# EAGLE board CT_schematic (EAGLE 7.6.0)

Size 100 x 80 mm. Coordinates in mm from the lower left corner, seen from the top.
Outline: 0,0 100,0 100,80 0,80 0,0
Copper layers (1*16): Top 0.035mm / dielectric 1.5mm / Bottom 0.035mm
Design rules "default": minimum track width 10mil, minimum drill 24mil, track to track 8mil, track to pad 8mil, pad to pad 8mil, via to via 8mil, smd to smd 8mil, copper to edge 40mil, drill to drill 8mil, minimum pad ring 10mil, minimum via ring 8mil, stop-mask expansion 4mil, vias tented up to drill 0mil, thermal gap 10mil

## Footprints (pad centres in the part's own frame; a part is rotated, then mirrored left to right if it is on the bottom)
C0603 = smd 0.8 x 0.8: 1 -0.762,0; 2 0.762,0
C0402 = smd 0.5 x 0.5: 1 -0.508,0; 2 0.508,0
C0805 = smd 1.2 x 1.3: 1 -1.016,0; 2 1.016,0
2220 = smd 1.85 x 5.5: 1 -2.55,0; 2 2.55,0
EXV-9H = smd 3.505 x 1.676: 1 -2.857,0; 2 2.857,0
L0603 = smd 0.8 x 0.8: 1 -0.762,0; 2 0.762,0
DR1040 = smd 1.6 x 3.2: 1 -4.458,0; 2 4.458,0
PJ-037B_PACKAGE = drill 3.7 square: 1 12,0 | drill 3.2 square: 2 6,0
R0603 = smd 0.8 x 0.8: 1 -0.762,0; 2 0.762,0
LQFP100 = smd 0.3 x 1.2: 1 -6,-7.75; 2 -5.5,-7.75; 3 -5,-7.75; 4 -4.5,-7.75; 5 -4,-7.75; 6 -3.5,-7.75; 7 -3,-7.75; 8 -2.5,-7.75; 9 -2,-7.75; 10 -1.5,-7.75; 11 -1,-7.75; 12 -0.5,-7.75; 13 0,-7.75; 14 0.5,-7.75; 15 1,-7.75; 16 1.5,-7.75; 17 2,-7.75; 18 2.5,-7.75; 19 3,-7.75; 20 3.5,-7.75; 21 4,-7.75; 22 4.5,-7.75; 23 5,-7.75; 24 5.5,-7.75; 25 6,-7.75; 51 6,7.75; 52 5.5,7.75; 53 5,7.75; 54 4.5,7.75; 55 4,7.75; 56 3.5,7.75; 57 3,7.75; 58 2.5,7.75; 59 2,7.75; 60 1.5,7.75; 61 1,7.75; 62 0.5,7.75; 63 0,7.75; 64 -0.5,7.75; 65 -1,7.75; 66 -1.5,7.75; 67 -2,7.75; 68 -2.5,7.75; 69 -3,7.75; 70 -3.5,7.75; 71 -4,7.75; 72 -4.5,7.75; 73 -5,7.75; 74 -5.5,7.75; 75 -6,7.75 | smd 1.2 x 0.3: 26 7.75,-6; 27 7.75,-5.5; 28 7.75,-5; 29 7.75,-4.5; 30 7.75,-4; 31 7.75,-3.5; 32 7.75,-3; 33 7.75,-2.5; 34 7.75,-2; 35 7.75,-1.5; 36 7.75,-1; 37 7.75,-0.5; 38 7.75,0; 39 7.75,0.5; 40 7.75,1; 41 7.75,1.5; 42 7.75,2; 43 7.75,2.5; 44 7.75,3; 45 7.75,3.5; 46 7.75,4; 47 7.75,4.5; 48 7.75,5; 49 7.75,5.5; 50 7.75,6; 76 -7.75,6; 77 -7.75,5.5; 78 -7.75,5; 79 -7.75,4.5; 80 -7.75,4; 81 -7.75,3.5; 82 -7.75,3; 83 -7.75,2.5; 84 -7.75,2; 85 -7.75,1.5; 86 -7.75,1; 87 -7.75,0.5; 88 -7.75,0; 89 -7.75,-0.5; 90 -7.75,-1; 91 -7.75,-1.5; 92 -7.75,-2; 93 -7.75,-2.5; 94 -7.75,-3; 95 -7.75,-3.5; 96 -7.75,-4; 97 -7.75,-4.5; 98 -7.75,-5; 99 -7.75,-5.5; 100 -7.75,-6
ARDUCAM = drill 1 pad 1.8 square: 1 0,0 | drill 1 pad 1.8: 2 0,2.54; 3 2.54,0; 4 2.54,2.54; 5 5.08,0; 6 5.08,2.54; 7 7.62,0; 8 7.62,2.54; 9 10.16,0; 10 10.16,2.54; 11 12.7,0; 12 12.7,2.54; 13 15.24,0; 14 15.24,2.54; 15 17.78,0; 16 17.78,2.54; 17 20.32,0; 18 20.32,2.54; 19 22.86,0; 20 22.86,2.54
SSOP-28 = smd 1.5 x 0.4: 1 -3.625,4.225; 2 -3.625,3.575; 3 -3.625,2.925; 4 -3.625,2.275; 5 -3.625,1.625; 6 -3.625,0.975; 7 -3.625,0.325; 8 -3.625,-0.325; 9 -3.625,-0.975; 10 -3.625,-1.625; 11 -3.625,-2.275; 12 -3.625,-2.925; 13 -3.625,-3.575; 14 -3.625,-4.225; 15 3.625,-4.225; 16 3.625,-3.575; 17 3.625,-2.925; 18 3.625,-2.275; 19 3.625,-1.625; 20 3.625,-0.975; 21 3.625,-0.325; 22 3.625,0.325; 23 3.625,0.975; 24 3.625,1.625; 25 3.625,2.275; 26 3.625,2.925; 27 3.625,3.575; 28 3.625,4.225
FCI_10118193-0001LF = smd 0.4 x 1.35: 1 -1.3,2.675; 2 -0.65,2.675; 3 0,2.675; 4 0.65,2.675; 5 1.3,2.675 | smd 1.6 x 1.4: 6 -3.2,2.45; 7 3.2,2.45 | smd 1.9 x 1.9: 8 -1.2,0; 9 1.2,0 | hole 0.5: -3.3,0; 3.3,0
SOT-23-8 = smd 0.4 x 1.2: 1 -0.975,-1.3; 2 -0.325,-1.3; 3 0.325,-1.3; 4 0.975,-1.3; 5 0.975,1.3; 6 0.325,1.3; 7 -0.325,1.3; 8 -0.975,1.3
182-009-MALE = drill 1.194 pad 1.524 octagon: 1 -5.537,10.923; 2 -2.769,10.923; 3 0,10.923; 4 2.769,10.923; 5 5.537,10.923; 6 -4.153,8.08; 7 -1.384,8.08; 8 1.384,8.08; 9 4.153,8.08 | hole 3.048: -12.446,9.501; 12.446,9.501
WSON-8-PAD = smd 0.45 x 0.7: 1 -0.75,-0.95; 2 0.52,-0.95; 3 1.79,-0.95; 4 3.06,-0.95; 5 3.06,4.35; 6 1.79,4.35; 7 0.52,4.35; 8 -0.75,4.35 | smd 4 x 3.5: PAD 1.15,1.7
ABLS-12.000MHZ-B4-T = smd 5.6 x 2.8: 1 0,0; 2 9.5,0
ASEK = smd 1.4 x 1: 1 -1.1,-0.8; 2 1.1,-0.8; 3 1.1,0.8; 4 -1.1,0.8
ASFL1 = smd 1.7 x 1.5: 1 -1.27,-1.1; 2 1.27,-1.1; 3 1.27,1.1; 4 -1.27,1.1
IDT74FCT38072 = smd 0.51 x 1: 1 0,0; 2 1.27,0; 3 2.54,0; 4 3.81,0; 5 3.81,4.95; 6 2.54,4.95; 7 1.27,4.95; 8 0,4.95
QFN-16_EP = smd 0.805 x 0.3: 1 -1.452,0.75; 2 -1.452,0.25; 3 -1.452,-0.25; 4 -1.452,-0.75; 9 1.452,-0.75; 10 1.452,-0.25; 11 1.452,0.25; 12 1.452,0.75 | smd 0.3 x 0.805: 5 -0.75,-1.452; 6 -0.25,-1.452; 7 0.25,-1.452; 8 0.75,-1.452; 13 0.75,1.452; 14 0.25,1.452; 15 -0.25,1.452; 16 -0.75,1.452 | smd 1.55 x 1.55: 17 0,0
SON-6 = smd 0.55 x 0.3: 1 -0.355,0.5 | smd 0.52 x 0.3: 2 -0.37,0; 3 -0.37,-0.5; 4 0.37,-0.5; 5 0.37,0; 6 0.37,0.5
SW_4-1437565-2 = smd 1.4 x 2.1: 1 -2.23,4.55; 2 -2.23,-4.55; 3 2.23,4.55; 4 2.23,-4.55
LGM67K-G1J2-24-Z = smd 0.8 x 1.4: A -2,0; C 0,0
NC7SZ125M5X = smd 1.3 x 0.7: 1 -1.3,0.95; 2 -1.3,0; 3 -1.3,-0.95; 4 1.3,-0.95; 5 1.3,0.95
DUMMY_PACKAGE_160 = drill 0.3: 1 0,-1; 2 1.5,-1

## Placement (x,y rotation side)
C1  1e-06  [C0603]  -30.48,73.66 0 top  (outside the outline)
C2  1e-07  [C0603]  -34.29,73.66 0 top  (outside the outline)
C3  1e-07  [C0603]  -38.1,73.66 0 top  (outside the outline)
C4  1e-07  [C0603]  -41.91,73.66 0 top  (outside the outline)
C5  1e-07  [C0603]  -45.72,73.66 0 top  (outside the outline)
C6  1e-07  [C0603]  -49.53,73.66 0 top  (outside the outline)
C7  1e-07  [C0603]  -53.34,73.66 0 top  (outside the outline)
C8  4.7e-06  [C0603]  -19.05,73.66 0 top  (outside the outline)
C9  2.2e-06  [C0603]  -22.86,73.66 0 top  (outside the outline)
C10  2.2e-06  [C0603]  -26.67,73.66 0 top  (outside the outline)
C11  1e-08  [C0603]  -57.15,73.66 0 top  (outside the outline)
C12  1e-06  [C0603]  -60.96,73.66 0 top  (outside the outline)
C13  1e-06  [C0603]  -64.77,73.66 0 top  (outside the outline)
C14  1e-07  [C0402]  -49.53,78.74 0 top  (outside the outline)
C15  4.7e-06  [C0805]  -15.24,68.58 0 top  (outside the outline)
C16  1e-07  [C0402]  -53.34,78.74 0 top  (outside the outline)
C17  1e-07  [C0402]  -57.15,78.74 0 top  (outside the outline)
C18  1e-07  [C0402]  -60.96,78.74 0 top  (outside the outline)
C19  1e-06  [C0603]  -68.58,73.66 0 top  (outside the outline)
C20  1e-08  [C0402]  -64.77,78.74 0 top  (outside the outline)
C21  1e-08  [C0402]  -68.58,78.74 0 top  (outside the outline)
C22  1e-08  [C0402]  -72.39,78.74 0 top  (outside the outline)
C23  1e-05  [C0805]  -20.32,68.58 0 top  (outside the outline)
C24  1e-06  [C0603]  -72.39,73.66 0 top  (outside the outline)
C25  1e-07  [C0402]  -76.2,78.74 0 top  (outside the outline)
C26  6.8e-05  [2220]  -29.21,43.18 0 top  (outside the outline)
C27  1e-07  [C0402]  -15.24,83.82 0 top  (outside the outline)
C28  0.0001  [EXV-9H]  -38.1,54.61 0 top  (outside the outline)
C29  0.0001  [EXV-9H]  -49.53,54.61 0 top  (outside the outline)
C30  1e-08  [C0402]  -19.05,83.82 0 top  (outside the outline)
C31  1e-08  [C0402]  -22.86,83.82 0 top  (outside the outline)
C32  1e-08  [C0402]  -26.67,83.82 0 top  (outside the outline)
F1  240.0  [L0603]  -76.2,73.66 0 top  (outside the outline)
I1  3.8e-06  [DR1040]  -19.05,44.45 0 top  (outside the outline)
J1  PJ-037B  [PJ-037B_PACKAGE]  -40.64,29.21 0 top  (outside the outline)
R2  1000.0  [R0603]  -15.24,78.74 0 top  (outside the outline)
R4  4700.0  [R0603]  -19.05,78.74 0 top  (outside the outline)
R5  4700.0  [R0603]  -22.86,78.74 0 top  (outside the outline)
R6  4700.0  [R0603]  -26.67,78.74 0 top  (outside the outline)
R7  10000.0  [R0603]  -40.64,68.58 0 top  (outside the outline)
R8  4700.0  [R0603]  -30.48,78.74 0 top  (outside the outline)
R9  10000.0  [R0603]  -45.72,68.58 0 top  (outside the outline)
R10  10000.0  [R0603]  -50.8,68.58 0 top  (outside the outline)
R11  120.0  [R0603]  -34.29,78.74 0 top  (outside the outline)
R12  10000.0  [R0603]  -55.88,68.58 0 top  (outside the outline)
R13  10000.0  [R0603]  -60.96,68.58 0 top  (outside the outline)
R14  20000.0  [R0603]  -66.04,68.58 0 top  (outside the outline)
R15  91000.0  [R0603]  -71.12,68.58 0 top  (outside the outline)
R16  300000.0  [R0603]  -25.4,68.58 0 top  (outside the outline)
R17  10000.0  [R0603]  -76.2,68.58 0 top  (outside the outline)
R18  10000.0  [R0603]  -15.24,73.66 0 top  (outside the outline)
R19  9100.0  [R0603]  -38.1,78.74 0 top  (outside the outline)
R20  680000.0  [R0603]  -30.48,68.58 0 top  (outside the outline)
R21  120000.0  [R0603]  -35.56,68.58 0 top  (outside the outline)
U1  STM32F765VGT6  [LQFP100]  -63.5,8.89 0 top  (outside the outline)
U2  arducam_ov2640  [ARDUCAM]  -40.64,59.69 0 top  (outside the outline)
U3  FT232RL-REEL  [SSOP-28]  -20.32,30.48 0 top  (outside the outline)
U4  10118193-0001LF  [FCI_10118193-0001LF]  -55.88,41.91 0 top  (outside the outline)
U5  MAX3051EKA+T  [SOT-23-8]  -58.42,60.96 0 top  (outside the outline)
U6  182-009-113R531  [182-009-MALE]  -36.83,6.35 0 top  (outside the outline)
U7  MX25R6435FZAIH0  [WSON-8-PAD]  -76.2,26.67 0 top  (outside the outline)
U8  ABLS-12.000MHZ-B4-T  [ABLS-12.000MHZ-B4-T]  -71.12,54.61 0 top  (outside the outline)
U9  ASEK-32.768KHz-ECST  [ASEK]  -29.21,54.61 0 top  (outside the outline)
U10  ASFL1-25MHZ-NCS  [ASFL1]  -46.99,43.18 0 top  (outside the outline)
U11  idt74fct38072  [IDT74FCT38072]  -77.47,39.37 0 top  (outside the outline)
U12  LTC3601EUD#PBF  [QFN-16_EP]  -43.18,78.74 0 top  (outside the outline)
U13  TPS3895ADRYR  [SON-6]  -34.29,82.55 0 top  (outside the outline)
U14  4-1437565-2  [SW_4-1437565-2]  -57.15,27.94 0 top  (outside the outline)
U15  Q65110A2395  [LGM67K-G1J2-24-Z]  -48.26,62.23 0 top  (outside the outline)
U16  nc7sz125m5x  [NC7SZ125M5X]  -63.5,60.96 0 top  (outside the outline)
U17  nc7sz125m5x  [NC7SZ125M5X]  -69.85,60.96 0 top  (outside the outline)
U18  nc7sz125m5x  [NC7SZ125M5X]  -76.2,60.96 0 top  (outside the outline)
U19  Dummy  [DUMMY_PACKAGE_160]  -31.75,83.82 0 top  (outside the outline)

## Library data of the parts
C1-C32 F1 I1 J1 R2 R4-R21 U1-U19 = circuit_tree

## Nets
CLK_CRYSTAL_U3_27: U3.27 U8.1
CLK_CRYSTAL_U3_28: U3.28 U8.2
CLK_U1_8: U1.8 U9.3
CLK_U1_12: U1.12 U11.6
CLK_U2_8: U2.8 U11.7
CLK_U11_3: U10.3 U11.3
GND: C1.2 C2.2 C3.2 C4.2 C5.2 C6.2 C7.2 C8.2 C9.2 C10.2 C11.2 C12.2 C13.2 C14.2 C15.2 C16.2 C17.2 C18.2 C19.2 C20.2 C21.2 C22.2 C23.2 C24.2 C26.1 C26.2 C27.2 C28.2 C29.2 C30.2 C31.2 C32.2 J1.2 R2.2 R7.2 R10.2 R14.2 R16.2 R19.2 R21.2 U1.10 U1.19 U1.26 U1.49 U1.74 U1.99 U2.2 U2.20 U3.7 U3.18 U3.21 U3.25 U3.26 U4.5 U4.6 U4.7 U4.8 U4.9 U5.2 U5.8 U6.5 U7.4 U7.PAD U9.2 U10.2 U11.4 U11.5 U11.8 U12.1 U12.9 U12.17 U13.2 U15.C U16.1 U16.3 U17.1 U17.3 U18.1 U18.3 U19.1
NET_U1_14: R5.1 U1.14 U17.4
NET_U1_21: C11.1 C12.1 F1.1 U1.20 U1.21
NET_U1_48: C9.1 U1.48
NET_U1_73: C10.1 U1.73
NET_U1_94: R7.1 U1.94
NET_U1_97: U15.A
NET_U1_98: U14.3 U14.4
NET_U2_19: R6.1 U2.19 U18.4
NET_U3_14: R9.1 U3.14
NET_U3_17: C16.1 U3.17
NET_U3_19: R10.1 U3.19
NET_U4_1: R8.1 U4.1
NET_U4_2: U3.16 U4.2
NET_U4_3: U3.15 U4.3
NET_U4_19: R8.2
NET_U5_6: R11.2 U5.6
NET_U6_2: R11.2 U5.6 U6.2
NET_U6_3: R11.1 U5.7 U6.3
NET_U7_7: R4.1 U1.23 U7.7 U16.4
NET_U12_3: C25.2 I1.1 U12.3 U12.4
NET_U12_6: C25.1 U12.6
NET_U12_7: C24.1 U12.7 U12.12
NET_U12_10: R16.1 U12.10
NET_U12_11: R14.1 R15.1 U12.11
NET_U12_14: U12.14
NET_U12_ATNET_3: I1.2 R15.2
NET_U13_1: R18.1 R19.1 U13.1
NET_U13_3: R20.2 R21.1 U13.3
NET_U13_4: R17.1 U13.4 U16.2 U17.2 U18.2
NET_U14_1: R2.1 U14.1 U14.2
PROC_CAN1_RX: U1.70 U5.4
PROC_CAN1_TX: U1.71 U5.1
PROC_DAC_OUT2: U1.29 U19.2
PROC_DCMI_D0: U1.63 U2.18
PROC_DCMI_D1: U1.64 U2.17
PROC_DCMI_D2: U1.65 U2.16
PROC_DCMI_D3: U1.66 U2.15
PROC_DCMI_D4: U1.3 U2.14
PROC_DCMI_D5: U1.84 U2.13
PROC_DCMI_D6: U1.4 U2.12
PROC_DCMI_D7: U1.5 U2.11
PROC_DCMI_D8: U1.78 U2.10
PROC_DCMI_D9: U1.80 U2.9
PROC_DCMI_HSYNC: U1.28 U2.6
PROC_DCMI_PIXCLK: U1.30 U2.7
PROC_DCMI_VSYNC: U1.93 U2.5
PROC_QUADSPI_BK1_IO0: U1.58 U7.5
PROC_QUADSPI_BK1_IO1: U1.59 U7.2
PROC_QUADSPI_BK1_IO2: R13.1 U1.1 U7.3
PROC_QUADSPI_BK1_NCS: R12.1 U1.46 U7.1
PROC_QUADSPI_CLK: U1.36 U7.6
PROC_UART4_CTS: U3.3
PROC_UART4_RTS: U3.11
PROC_UART4_RX: U3.1
PROC_UART4_TX: U3.5
VCC_S1_8V7: C23.1 C28.1 C29.1 J1.1 U12.15 U12.16
VCC_TIER1_3V3: C1.1 C2.1 C3.1 C4.1 C5.1 C6.1 C7.1 C8.1 C13.1 C14.1 C15.1 C17.1 C18.1 C19.1 C20.1 C21.1 C22.1 C26.2 C27.1 C30.1 C31.1 C32.1 F1.2 I1.2 R4.2 R5.2 R6.2 R9.2 R12.2 R13.2 R15.2 R17.2 R18.2 R20.1 U1.6 U1.11 U1.27 U1.50 U1.75 U1.100 U2.1 U3.4 U3.20 U5.3 U7.8 U9.4 U10.4 U11.1 U11.2 U12.8 U13.6 U16.5 U17.5 U18.5

## Tracks (layer width: path | path; a pad name or v marks a point on that pad's centre or on a via)
CLK_CRYSTAL_U3_27  (1 unrouted)
CLK_CRYSTAL_U3_28  (1 unrouted)
CLK_U1_8  (1 unrouted)
CLK_U1_12  (1 unrouted)
CLK_U2_8  (1 unrouted)
CLK_U11_3  (1 unrouted)
GND  (79 unrouted)
NET_U1_14  (2 unrouted)
NET_U1_21  (4 unrouted)
NET_U1_48  (1 unrouted)
NET_U1_73  (1 unrouted)
NET_U1_94  (1 unrouted)
NET_U1_98  (1 unrouted)
NET_U2_19  (2 unrouted)
NET_U3_14  (1 unrouted)
NET_U3_17  (1 unrouted)
NET_U3_19  (1 unrouted)
NET_U4_1  (1 unrouted)
NET_U4_2  (1 unrouted)
NET_U4_3  (1 unrouted)
NET_U5_6  (1 unrouted)
NET_U6_2  (2 unrouted)
NET_U6_3  (2 unrouted)
NET_U7_7  (3 unrouted)
NET_U12_3  (3 unrouted)
NET_U12_6  (1 unrouted)
NET_U12_7  (2 unrouted)
NET_U12_10  (1 unrouted)
NET_U12_11  (2 unrouted)
NET_U12_ATNET_3  (1 unrouted)
NET_U13_1  (2 unrouted)
NET_U13_3  (2 unrouted)
NET_U13_4  (4 unrouted)
NET_U14_1  (2 unrouted)
PROC_CAN1_RX  (1 unrouted)
PROC_CAN1_TX  (1 unrouted)
PROC_DAC_OUT2  (1 unrouted)
PROC_DCMI_D0  (1 unrouted)
PROC_DCMI_D1  (1 unrouted)
PROC_DCMI_D2  (1 unrouted)
PROC_DCMI_D3  (1 unrouted)
PROC_DCMI_D4  (1 unrouted)
PROC_DCMI_D5  (1 unrouted)
PROC_DCMI_D6  (1 unrouted)
PROC_DCMI_D7  (1 unrouted)
PROC_DCMI_D8  (1 unrouted)
PROC_DCMI_D9  (1 unrouted)
PROC_DCMI_HSYNC  (1 unrouted)
PROC_DCMI_PIXCLK  (1 unrouted)
PROC_DCMI_VSYNC  (1 unrouted)
PROC_QUADSPI_BK1_IO0  (1 unrouted)
PROC_QUADSPI_BK1_IO1  (1 unrouted)
PROC_QUADSPI_BK1_IO2  (2 unrouted)
PROC_QUADSPI_BK1_NCS  (2 unrouted)
PROC_QUADSPI_CLK  (1 unrouted)
VCC_S1_8V7  (5 unrouted)
VCC_TIER1_3V3  (53 unrouted)